# Altium PCB HGD_Sensor(v0.1)-20200807.PcbDoc (part 3 of 3)
Units mil, origin at the board's own origin, x right, y up, seen from the top; angles counter-clockwise.
Board outline 2299.21 x 2125.98 mil, 2 copper layers (TopLayer, BottomLayer); 55 components, 33 nets, 176 pads, 331 vias.
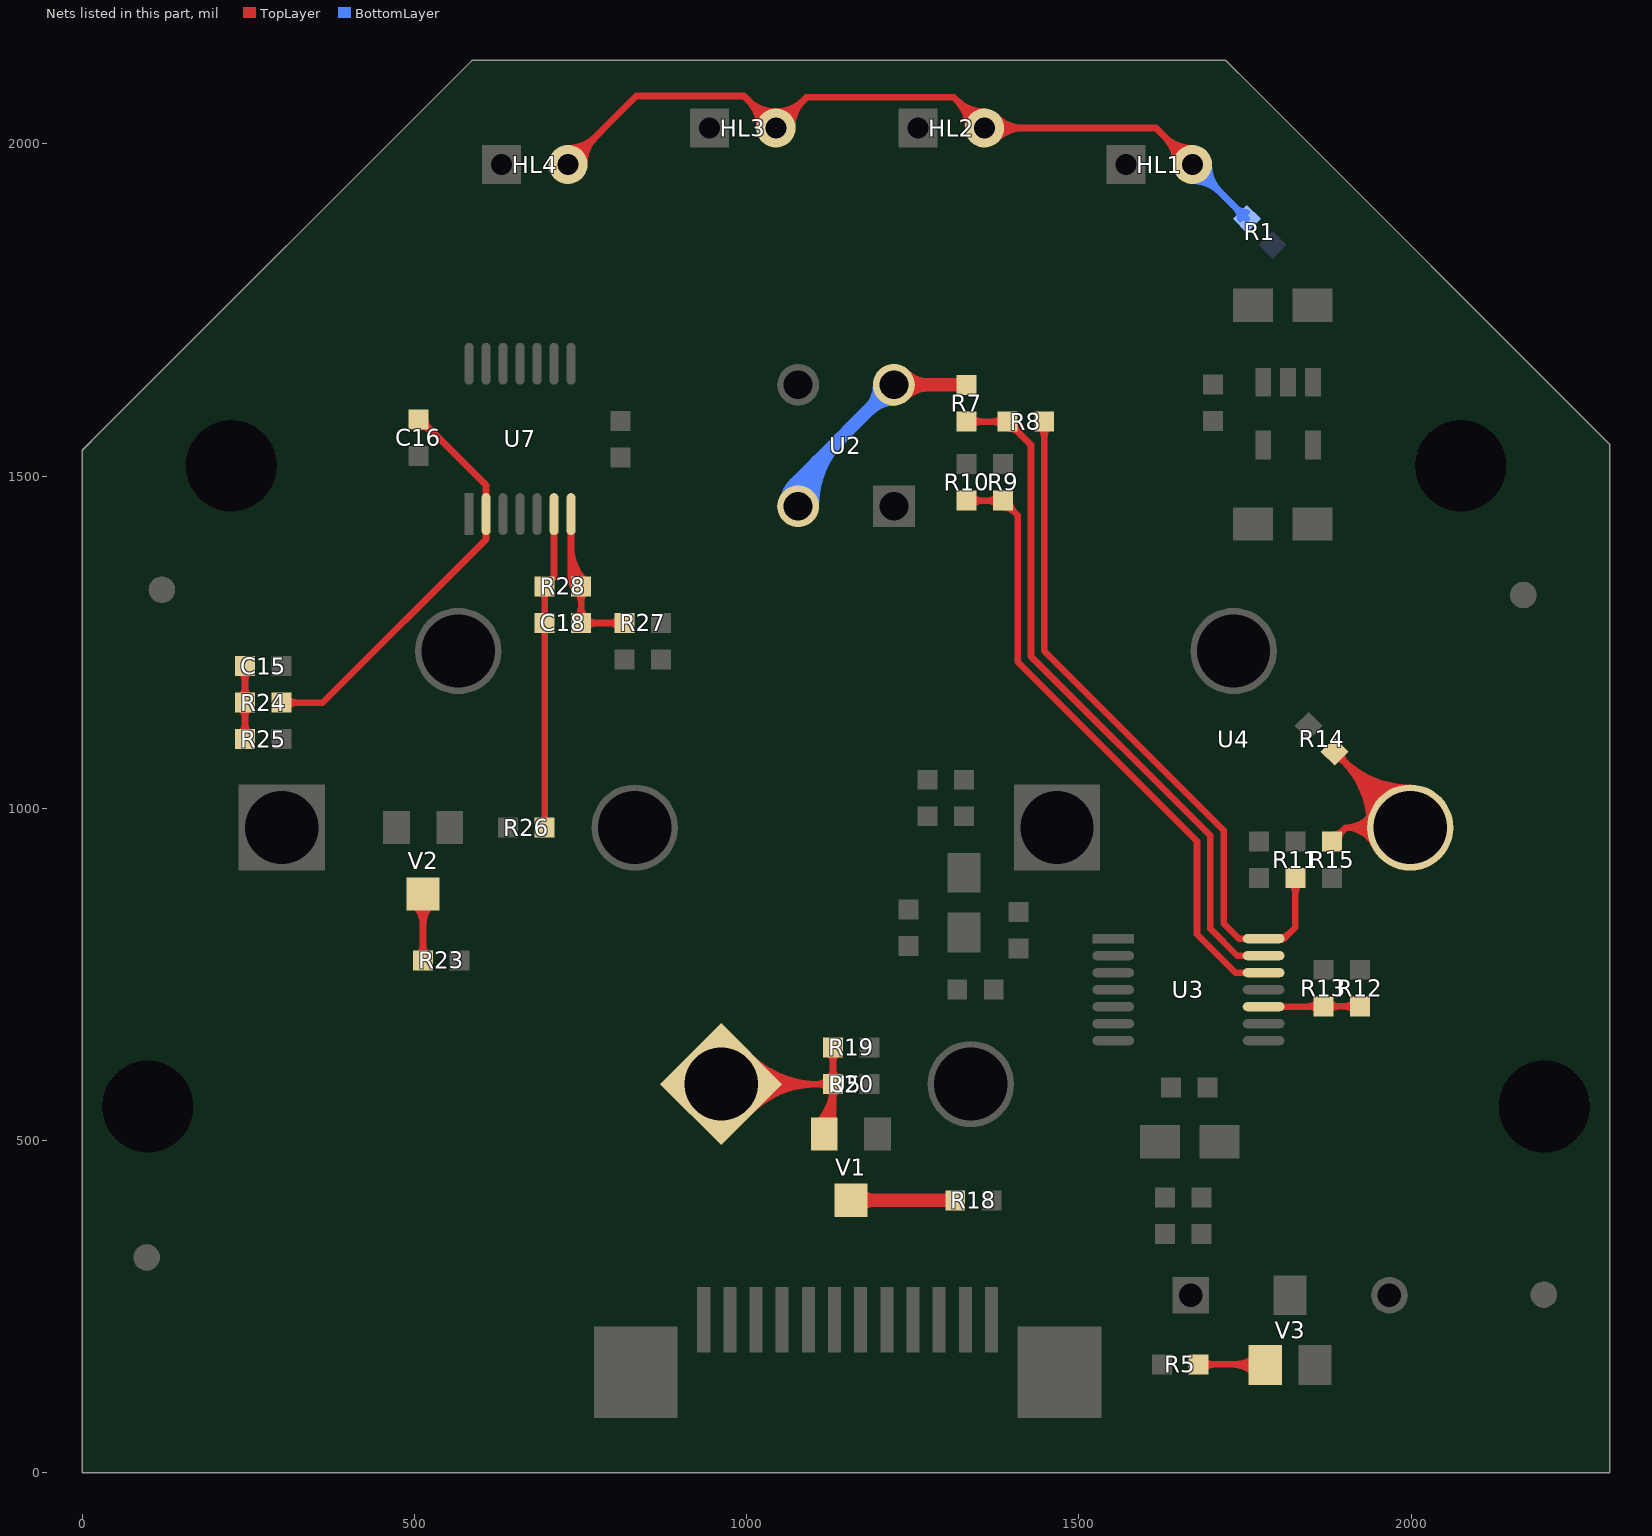
[diagram p3: the nets of this part, all layers, seen from the top]

## Via types
v1: diameter 24, hole 12, TopLayer to BottomLayer, tented both sides, 331 vias

## Nets (pads, with @x,y where several pads share a name; then routed paths per layer and width w, separated by ;. In a path a pad name is that pad's centre, name@x,y a point inside that pad or via, vN(x,y) a via of type N, cw(c..) or ccw(c..) an arc to the next point about the centre after c; other vN are vias at no path point) (continued)
NetC15_2: C15.2 R24.2 R25.1 | length 716.8
  TopLayer w10: R25.1@245,1104 R24.2@245,1159 C15.2@245,1214 ; R25.1@237.93,1111.07 ccw(c220.86,1128.14) 245,1128.14 ; R25.1@237.93,1111.07 ccw(c220.86,1128.14) 245,1128.14 ; R25.1@237.93,1111.07 ccw(c220.86,1128.14) 245,1128.14 ; R25.1@237.93,1111.07 ccw(c220.86,1128.14) 245,1128.14 ; R24.2@237.93,1151.93 cw(c220.86,1134.86) 245,1134.86 ; R24.2@237.93,1151.93 cw(c220.86,1134.86) 245,1134.86 ; R24.2@237.93,1151.93 cw(c220.86,1134.86) 245,1134.86 ; R24.2@237.93,1151.93 cw(c220.86,1134.86) 245,1134.86 ; R24.2@237.93,1166.07 ccw(c220.86,1183.14) 245,1183.14 ; R24.2@237.93,1166.07 ccw(c220.86,1183.14) 245,1183.14 ; R24.2@237.93,1166.07 ccw(c220.86,1183.14) 245,1183.14 ; R24.2@237.93,1166.07 ccw(c220.86,1183.14) 245,1183.14 ; C15.2@237.93,1206.93 cw(c220.86,1189.86) 245,1189.86 ; C15.2@237.93,1206.93 cw(c220.86,1189.86) 245,1189.86 ; C15.2@237.93,1206.93 cw(c220.86,1189.86) 245,1189.86 ; C15.2@237.93,1206.93 cw(c220.86,1189.86) 245,1189.86 ; 245,1128.14 ccw(c269.14,1128.14) R25.1@252.07,1111.07 ; 245,1128.14 ccw(c269.14,1128.14) R25.1@252.07,1111.07 ; 245,1128.14 ccw(c269.14,1128.14) R25.1@252.07,1111.07 ; 245,1128.14 ccw(c269.14,1128.14) R25.1@252.07,1111.07 ; 245,1134.86 cw(c269.14,1134.86) R24.2@252.07,1151.93 ; 245,1134.86 cw(c269.14,1134.86) R24.2@252.07,1151.93 ; 245,1134.86 cw(c269.14,1134.86) R24.2@252.07,1151.93 ; 245,1134.86 cw(c269.14,1134.86) R24.2@252.07,1151.93 ; 245,1183.14 ccw(c269.14,1183.14) R24.2@252.07,1166.07 ; 245,1183.14 ccw(c269.14,1183.14) R24.2@252.07,1166.07 ; 245,1183.14 ccw(c269.14,1183.14) R24.2@252.07,1166.07 ; 245,1183.14 ccw(c269.14,1183.14) R24.2@252.07,1166.07 ; 245,1189.86 cw(c269.14,1189.86) C15.2@252.07,1206.93 ; 245,1189.86 cw(c269.14,1189.86) C15.2@252.07,1206.93 ; 245,1189.86 cw(c269.14,1189.86) C15.2@252.07,1206.93 ; 245,1189.86 cw(c269.14,1189.86) C15.2@252.07,1206.93
NetC16_1: C16.1 R24.1 U7.2 | length 861.5
  TopLayer w10: R24.1@300,1159 362,1159 607.82,1404.82 U7.2@607.82,1442.81 607.82,1486.47 509.28,1585 C16.1@506,1585 ; R24.1@307.07,1151.93 cw(c324.14,1134.86) 324.14,1159 ; R24.1@307.07,1151.93 cw(c324.14,1134.86) 324.14,1159 ; R24.1@307.07,1151.93 cw(c324.14,1134.86) 324.14,1159 ; R24.1@307.07,1151.93 cw(c324.14,1134.86) 324.14,1159 ; R24.1@307.07,1166.07 ccw(c324.14,1183.14) 324.14,1159 ; R24.1@307.07,1166.07 ccw(c324.14,1183.14) 324.14,1159 ; R24.1@307.07,1166.07 ccw(c324.14,1183.14) 324.14,1159 ; R24.1@307.07,1166.07 ccw(c324.14,1183.14) 324.14,1159 ; C16.1@506,1575 cw(c506,1542.93) 528.68,1565.61 ccw(c506,1542.93) C16.1@506,1575 ; C16.1@516,1585 ccw(c532.21,1585) 520.75,1573.54 cw(c532.21,1585) C16.1@516,1585
NetC18_1: C18.1 R27.1 R28.2 U7.7 | length 1213.4
  TopLayer w10: U7.7@735.77,1442.81 735.77,1349.23 ; R27.1@816,1279 C18.1@751,1279 R28.2@751,1334 ; 735.77,1349.23 ccw(c748.63,1362.09) R28.2@750.16,1343.96 ; 735.77,1349.23 cw(c722.91,1336.37) R28.2@741.04,1334.84 ; 735.77,1349.23 ccw(c748.63,1362.09) R28.2@750.16,1343.96 ; 735.77,1349.23 cw(c722.91,1336.37) R28.2@741.04,1334.84 ; 735.77,1349.23 ccw(c748.63,1362.09) R28.2@750.16,1343.96 ; 735.77,1349.23 cw(c722.91,1336.37) R28.2@741.04,1334.84 ; 735.77,1349.23 ccw(c748.63,1362.09) R28.2@750.16,1343.96 ; 735.77,1349.23 cw(c722.91,1336.37) R28.2@741.04,1334.84 ; 735.77,1349.23 R28.2@751,1334 ; C18.1@743.93,1286.07 ccw(c726.86,1303.14) 751,1303.14 ; C18.1@743.93,1286.07 ccw(c726.86,1303.14) 751,1303.14 ; C18.1@743.93,1286.07 ccw(c726.86,1303.14) 751,1303.14 ; C18.1@743.93,1286.07 ccw(c726.86,1303.14) 751,1303.14 ; R28.2@743.93,1326.93 cw(c726.86,1309.86) 751,1309.86 ; R28.2@743.93,1326.93 cw(c726.86,1309.86) 751,1309.86 ; R28.2@743.93,1326.93 cw(c726.86,1309.86) 751,1309.86 ; R28.2@743.93,1326.93 cw(c763.62,1346.62) 735.77,1346.62 ccw(c763.62,1346.62) R28.2@743.93,1326.93 ; R28.2@743.93,1326.93 cw(c726.86,1309.86) 751,1309.86 ; 751,1303.14 ccw(c775.14,1303.14) C18.1@758.07,1286.07 ; 751,1303.14 ccw(c775.14,1303.14) C18.1@758.07,1286.07 ; 751,1303.14 ccw(c775.14,1303.14) C18.1@758.07,1286.07 ; 751,1303.14 ccw(c775.14,1303.14) C18.1@758.07,1286.07 ; 751,1309.86 cw(c775.14,1309.86) R28.2@758.07,1326.93 ; 751,1309.86 cw(c775.14,1309.86) R28.2@758.07,1326.93 ; 751,1309.86 cw(c775.14,1309.86) R28.2@758.07,1326.93 ; 751,1309.86 cw(c775.14,1309.86) R28.2@758.07,1326.93 ; R28.2@751,1334 cw(c787.76,1370.76) 735.77,1370.76 ccw(c787.76,1370.76) R28.2@751,1334 ; C18.1@758.07,1271.93 cw(c775.14,1254.86) 775.14,1279 ; C18.1@758.07,1271.93 cw(c775.14,1254.86) 775.14,1279 ; C18.1@758.07,1271.93 cw(c775.14,1254.86) 775.14,1279 ; C18.1@758.07,1271.93 cw(c775.14,1254.86) 775.14,1279 ; C18.1@758.07,1286.07 ccw(c775.14,1303.14) 775.14,1279 ; C18.1@758.07,1286.07 ccw(c775.14,1303.14) 775.14,1279 ; C18.1@758.07,1286.07 ccw(c775.14,1303.14) 775.14,1279 ; C18.1@758.07,1286.07 ccw(c775.14,1303.14) 775.14,1279 ; 791.86,1279 ccw(c791.86,1303.14) R27.1@808.93,1286.07 ; 791.86,1279 cw(c791.86,1254.86) R27.1@808.93,1271.93 ; 791.86,1279 ccw(c791.86,1303.14) R27.1@808.93,1286.07 ; 791.86,1279 cw(c791.86,1254.86) R27.1@808.93,1271.93 ; 791.86,1279 ccw(c791.86,1303.14) R27.1@808.93,1286.07 ; 791.86,1279 cw(c791.86,1254.86) R27.1@808.93,1271.93 ; 791.86,1279 ccw(c791.86,1303.14) R27.1@808.93,1286.07 ; 791.86,1279 cw(c791.86,1254.86) R27.1@808.93,1271.93 ; 735.77,1394.91 ccw(c811.91,1394.91) 758.07,1341.07 cw(c811.91,1394.91) 735.77,1394.91
NetC18_2: C18.2 R26.2 R28.1 U7.6 | length 477.7
  TopLayer w10: R26.2@696,971 C18.2@696,1279 R28.1@696,1334 710.18,1348.18 U7.6@710.18,1442.81
NetHL1_K: HL1.K HL2.K HL3.K HL4.K R1.1 | length 7441.5
  TopLayer w10: HL4.K@731,1969 834,2072 995.87,2072 HL3.K@1044,2023.87 1090.13,2070 1311.87,2070 HL2.K@1358,2023.87 1616.13,2023.87 HL1.K@1671,1969 ; HL4.K@731,1983.53 ccw(c731,2018.6) 755.8,1993.8 ; HL4.K@731,1983.53 ccw(c731,2018.6) 755.8,1993.8 ; HL4.K@731,1983.53 ccw(c731,2018.6) 755.8,1993.8 ; HL4.K@731,1983.53 ccw(c731,2018.6) 755.8,1993.8 ; HL4.K@731,1983.53 ccw(c731,2018.6) 755.8,1993.8 ; HL4.K@731,1983.53 ccw(c731,2018.6) 755.8,1993.8 ; HL4.K@731,1993.53 ccw(c731,2052.74) 772.87,2010.87 ; HL4.K@731,1993.53 ccw(c731,2052.74) 772.87,2010.87 ; HL4.K@731,1993.53 ccw(c731,2052.74) 772.87,2010.87 ; HL4.K@731,1993.53 ccw(c731,2052.74) 772.87,2010.87 ; HL4.K@731,1993.53 ccw(c731,2052.74) 772.87,2010.87 ; HL4.K@731,1993.53 ccw(c731,2052.74) 772.87,2010.87 ; HL4.K@745.53,1969 cw(c780.6,1969) 755.8,1993.8 ; HL4.K@745.53,1969 cw(c780.6,1969) 755.8,1993.8 ; HL4.K@745.53,1969 cw(c780.6,1969) 755.8,1993.8 ; HL4.K@745.53,1969 cw(c780.6,1969) 755.8,1993.8 ; HL4.K@745.53,1969 cw(c780.6,1969) 755.8,1993.8 ; HL4.K@745.53,1969 cw(c780.6,1969) 755.8,1993.8 ; HL4.K@755.53,1969 cw(c814.74,1969) 772.87,2010.87 ; HL4.K@755.53,1969 cw(c814.74,1969) 772.87,2010.87 ; HL4.K@755.53,1969 cw(c814.74,1969) 772.87,2010.87 ; HL4.K@755.53,1969 cw(c814.74,1969) 772.87,2010.87 ; HL4.K@755.53,1969 cw(c814.74,1969) 772.87,2010.87 ; HL4.K@755.53,1969 cw(c814.74,1969) 772.87,2010.87 ; 1002.13,2065.75 cw(c960.26,2023.87) HL3.K@1019.47,2023.87 ; 1002.13,2065.75 ccw(c1044,2107.62) HL3.K@1044,2048.4 ; 1002.13,2065.75 cw(c960.26,2023.87) HL3.K@1019.47,2023.87 ; 1002.13,2065.75 ccw(c1044,2107.62) HL3.K@1044,2048.4 ; 1002.13,2065.75 ccw(c1044,2107.62) HL3.K@1044,2048.4 ; 1002.13,2065.75 cw(c960.26,2023.87) HL3.K@1019.47,2023.87 ; 1002.13,2065.75 ccw(c1044,2107.62) HL3.K@1044,2048.4 ; 1002.13,2065.75 cw(c960.26,2023.87) HL3.K@1019.47,2023.87 ; 1002.13,2065.75 ccw(c1044,2107.62) HL3.K@1044,2048.4 ; 1002.13,2065.75 cw(c960.26,2023.87) HL3.K@1019.47,2023.87 ; 1002.13,2065.75 ccw(c1044,2107.62) HL3.K@1044,2048.4 ; 1002.13,2065.75 cw(c960.26,2023.87) HL3.K@1019.47,2023.87 ; 1019.2,2048.67 cw(c994.4,2023.87) HL3.K@1029.47,2023.87 ; 1019.2,2048.67 ccw(c1044,2073.47) HL3.K@1044,2038.4 ; 1019.2,2048.67 cw(c994.4,2023.87) HL3.K@1029.47,2023.87 ; 1019.2,2048.67 ccw(c1044,2073.47) HL3.K@1044,2038.4 ; 1019.2,2048.67 ccw(c1044,2073.47) HL3.K@1044,2038.4 ; 1019.2,2048.67 cw(c994.4,2023.87) HL3.K@1029.47,2023.87 ; 1019.2,2048.67 ccw(c1044,2073.47) HL3.K@1044,2038.4 ; 1019.2,2048.67 cw(c994.4,2023.87) HL3.K@1029.47,2023.87 ; 1019.2,2048.67 ccw(c1044,2073.47) HL3.K@1044,2038.4 ; 1019.2,2048.67 cw(c994.4,2023.87) HL3.K@1029.47,2023.87 ; 1019.2,2048.67 ccw(c1044,2073.47) HL3.K@1044,2038.4 ; 1019.2,2048.67 cw(c994.4,2023.87) HL3.K@1029.47,2023.87 ; HL3.K@1044,2038.4 ccw(c1044,2073.47) 1068.8,2048.67 ; HL3.K@1044,2038.4 ccw(c1044,2073.47) 1068.8,2048.67 ; HL3.K@1044,2038.4 ccw(c1044,2073.47) 1068.8,2048.67 ; HL3.K@1044,2038.4 ccw(c1044,2073.47) 1068.8,2048.67 ; HL3.K@1044,2038.4 ccw(c1044,2073.47) 1068.8,2048.67 ; HL3.K@1044,2038.4 ccw(c1044,2073.47) 1068.8,2048.67 ; HL3.K@1044,2048.4 ccw(c1044,2107.62) 1085.87,2065.75 ; HL3.K@1044,2048.4 ccw(c1044,2107.62) 1085.87,2065.75 ; HL3.K@1044,2048.4 ccw(c1044,2107.62) 1085.87,2065.75 ; HL3.K@1044,2048.4 ccw(c1044,2107.62) 1085.87,2065.75 ; HL3.K@1044,2048.4 ccw(c1044,2107.62) 1085.87,2065.75 ; HL3.K@1044,2048.4 ccw(c1044,2107.62) 1085.87,2065.75 ; HL3.K@1058.53,2023.87 cw(c1093.6,2023.87) 1068.8,2048.67 ; HL3.K@1058.53,2023.87 cw(c1093.6,2023.87) 1068.8,2048.67 ; HL3.K@1058.53,2023.87 cw(c1093.6,2023.87) 1068.8,2048.67 ; HL3.K@1058.53,2023.87 cw(c1093.6,2023.87) 1068.8,2048.67 ; HL3.K@1058.53,2023.87 cw(c1093.6,2023.87) 1068.8,2048.67 ; HL3.K@1058.53,2023.87 cw(c1093.6,2023.87) 1068.8,2048.67 ; HL3.K@1068.53,2023.87 cw(c1127.74,2023.87) 1085.87,2065.75 ; HL3.K@1068.53,2023.87 cw(c1127.74,2023.87) 1085.87,2065.75 ; HL3.K@1068.53,2023.87 cw(c1127.74,2023.87) 1085.87,2065.75 ; HL3.K@1068.53,2023.87 cw(c1127.74,2023.87) 1085.87,2065.75 ; HL3.K@1068.53,2023.87 cw(c1127.74,2023.87) 1085.87,2065.75 ; HL3.K@1068.53,2023.87 cw(c1127.74,2023.87) 1085.87,2065.75 ; 1316.13,2065.75 cw(c1274.26,2023.87) HL2.K@1333.47,2023.87 ; 1316.13,2065.75 ccw(c1358,2107.62) HL2.K@1358,2048.4 ; 1316.13,2065.75 cw(c1274.26,2023.87) HL2.K@1333.47,2023.87 ; 1316.13,2065.75 ccw(c1358,2107.62) HL2.K@1358,2048.4 ; 1316.13,2065.75 ccw(c1358,2107.62) HL2.K@1358,2048.4 ; 1316.13,2065.75 cw(c1274.26,2023.87) HL2.K@1333.47,2023.87 ; 1316.13,2065.75 ccw(c1358,2107.62) HL2.K@1358,2048.4 ; 1316.13,2065.75 cw(c1274.26,2023.87) HL2.K@1333.47,2023.87 ; 1316.13,2065.75 ccw(c1358,2107.62) HL2.K@1358,2048.4 ; 1316.13,2065.75 cw(c1274.26,2023.87) HL2.K@1333.47,2023.87 ; 1316.13,2065.75 ccw(c1358,2107.62) HL2.K@1358,2048.4 ; 1316.13,2065.75 cw(c1274.26,2023.87) HL2.K@1333.47,2023.87 ; 1333.2,2048.67 cw(c1308.4,2023.87) HL2.K@1343.47,2023.87 ; 1333.2,2048.67 ccw(c1358,2073.47) HL2.K@1358,2038.4 ; 1333.2,2048.67 cw(c1308.4,2023.87) HL2.K@1343.47,2023.87 ; 1333.2,2048.67 ccw(c1358,2073.47) HL2.K@1358,2038.4 ; 1333.2,2048.67 ccw(c1358,2073.47) HL2.K@1358,2038.4 ; 1333.2,2048.67 cw(c1308.4,2023.87) HL2.K@1343.47,2023.87 ; 1333.2,2048.67 ccw(c1358,2073.47) HL2.K@1358,2038.4 ; 1333.2,2048.67 cw(c1308.4,2023.87) HL2.K@1343.47,2023.87 ; 1333.2,2048.67 ccw(c1358,2073.47) HL2.K@1358,2038.4 ; 1333.2,2048.67 cw(c1308.4,2023.87) HL2.K@1343.47,2023.87 ; 1333.2,2048.67 ccw(c1358,2073.47) HL2.K@1358,2038.4 ; 1333.2,2048.67 cw(c1308.4,2023.87) HL2.K@1343.47,2023.87 ; HL2.K@1368.27,2013.6 cw(c1393.07,1988.8) 1393.07,2023.87 ; HL2.K@1368.27,2013.6 cw(c1393.07,1988.8) 1393.07,2023.87 ; HL2.K@1368.27,2013.6 cw(c1393.07,1988.8) 1393.07,2023.87 ; HL2.K@1368.27,2013.6 cw(c1393.07,1988.8) 1393.07,2023.87 ; HL2.K@1368.27,2013.6 cw(c1393.07,1988.8) 1393.07,2023.87 ; HL2.K@1368.27,2013.6 cw(c1393.07,1988.8) 1393.07,2023.87 ; HL2.K@1368.27,2034.15 ccw(c1393.07,2058.95) 1393.07,2023.87 ; HL2.K@1368.27,2034.15 ccw(c1393.07,2058.95) 1393.07,2023.87 ; HL2.K@1368.27,2034.15 ccw(c1393.07,2058.95) 1393.07,2023.87 ; HL2.K@1368.27,2034.15 ccw(c1393.07,2058.95) 1393.07,2023.87 ; HL2.K@1368.27,2034.15 ccw(c1393.07,2058.95) 1393.07,2023.87 ; HL2.K@1368.27,2034.15 ccw(c1393.07,2058.95) 1393.07,2023.87 ; HL2.K@1375.34,2006.53 cw(c1417.21,1964.66) 1417.21,2023.87 ; HL2.K@1375.34,2006.53 cw(c1417.21,1964.66) 1417.21,2023.87 ; HL2.K@1375.34,2006.53 cw(c1417.21,1964.66) 1417.21,2023.87 ; HL2.K@1375.34,2006.53 cw(c1417.21,1964.66) 1417.21,2023.87 ; HL2.K@1375.34,2006.53 cw(c1417.21,1964.66) 1417.21,2023.87 ; HL2.K@1375.34,2006.53 cw(c1417.21,1964.66) 1417.21,2023.87 ; HL2.K@1375.34,2041.22 ccw(c1417.21,2083.09) 1417.21,2023.87 ; HL2.K@1375.34,2041.22 ccw(c1417.21,2083.09) 1417.21,2023.87 ; HL2.K@1375.34,2041.22 ccw(c1417.21,2083.09) 1417.21,2023.87 ; HL2.K@1375.34,2041.22 ccw(c1417.21,2083.09) 1417.21,2023.87 ; HL2.K@1375.34,2041.22 ccw(c1417.21,2083.09) 1417.21,2023.87 ; HL2.K@1375.34,2041.22 ccw(c1417.21,2083.09) 1417.21,2023.87 ; 1629.13,2010.87 cw(c1587.26,1969) HL1.K@1646.47,1969 ; 1629.13,2010.87 ccw(c1671,2052.74) HL1.K@1671,1993.53 ; 1629.13,2010.87 cw(c1587.26,1969) HL1.K@1646.47,1969 ; 1629.13,2010.87 ccw(c1671,2052.74) HL1.K@1671,1993.53 ; 1629.13,2010.87 ccw(c1671,2052.74) HL1.K@1671,1993.53 ; 1629.13,2010.87 cw(c1587.26,1969) HL1.K@1646.47,1969 ; 1629.13,2010.87 ccw(c1671,2052.74) HL1.K@1671,1993.53 ; 1629.13,2010.87 cw(c1587.26,1969) HL1.K@1646.47,1969 ; 1629.13,2010.87 ccw(c1671,2052.74) HL1.K@1671,1993.53 ; 1629.13,2010.87 cw(c1587.26,1969) HL1.K@1646.47,1969 ; 1629.13,2010.87 ccw(c1671,2052.74) HL1.K@1671,1993.53 ; 1629.13,2010.87 cw(c1587.26,1969) HL1.K@1646.47,1969 ; 1646.2,1993.8 cw(c1621.4,1969) HL1.K@1656.47,1969 ; 1646.2,1993.8 ccw(c1671,2018.6) HL1.K@1671,1983.53 ; 1646.2,1993.8 cw(c1621.4,1969) HL1.K@1656.47,1969 ; 1646.2,1993.8 ccw(c1671,2018.6) HL1.K@1671,1983.53 ; 1646.2,1993.8 ccw(c1671,2018.6) HL1.K@1671,1983.53 ; 1646.2,1993.8 cw(c1621.4,1969) HL1.K@1656.47,1969 ; 1646.2,1993.8 ccw(c1671,2018.6) HL1.K@1671,1983.53 ; 1646.2,1993.8 cw(c1621.4,1969) HL1.K@1656.47,1969 ; 1646.2,1993.8 ccw(c1671,2018.6) HL1.K@1671,1983.53 ; 1646.2,1993.8 cw(c1621.4,1969) HL1.K@1656.47,1969 ; 1646.2,1993.8 ccw(c1671,2018.6) HL1.K@1671,1983.53 ; 1646.2,1993.8 cw(c1621.4,1969) HL1.K@1656.47,1969
  BottomLayer w10: HL1.K@1671,1969 R1.1@1753,1887 ; HL1.K@1671,1944.47 cw(c1671,1885.26) 1712.87,1927.13 ; HL1.K@1671,1944.47 cw(c1671,1885.26) 1712.87,1927.13 ; HL1.K@1671,1944.47 cw(c1671,1885.26) 1712.87,1927.13 ; HL1.K@1671,1944.47 cw(c1671,1885.26) 1712.87,1927.13 ; HL1.K@1671,1944.47 cw(c1671,1885.26) 1712.87,1927.13 ; HL1.K@1671,1954.47 cw(c1671,1919.4) 1695.8,1944.2 ; HL1.K@1671,1954.47 cw(c1671,1919.4) 1695.8,1944.2 ; HL1.K@1671,1954.47 cw(c1671,1919.4) 1695.8,1944.2 ; HL1.K@1671,1954.47 cw(c1671,1919.4) 1695.8,1944.2 ; HL1.K@1671,1954.47 cw(c1671,1919.4) 1695.8,1944.2 ; HL1.K@1685.53,1969 ccw(c1720.6,1969) 1695.8,1944.2 ; HL1.K@1685.53,1969 ccw(c1720.6,1969) 1695.8,1944.2 ; HL1.K@1685.53,1969 ccw(c1720.6,1969) 1695.8,1944.2 ; HL1.K@1685.53,1969 ccw(c1720.6,1969) 1695.8,1944.2 ; HL1.K@1685.53,1969 ccw(c1720.6,1969) 1695.8,1944.2 ; HL1.K@1695.53,1969 ccw(c1754.74,1969) 1712.87,1927.13 ; HL1.K@1695.53,1969 ccw(c1754.74,1969) 1712.87,1927.13 ; HL1.K@1695.53,1969 ccw(c1754.74,1969) 1712.87,1927.13 ; HL1.K@1695.53,1969 ccw(c1754.74,1969) 1712.87,1927.13 ; HL1.K@1695.53,1969 ccw(c1754.74,1969) 1712.87,1927.13 ; 1735.93,1904.07 cw(c1718.86,1887) R1.1@1743,1887 ; 1735.93,1904.07 ccw(c1753,1921.14) R1.1@1753,1897 ; 1735.93,1904.07 ccw(c1753,1921.14) R1.1@1753,1897 ; 1735.93,1904.07 cw(c1718.86,1887) R1.1@1743,1887 ; 1735.93,1904.07 ccw(c1753,1921.14) R1.1@1753,1897 ; 1735.93,1904.07 cw(c1718.86,1887) R1.1@1743,1887 ; 1735.93,1904.07 ccw(c1753,1921.14) R1.1@1753,1897 ; 1735.93,1904.07 cw(c1718.86,1887) R1.1@1743,1887 ; 1735.93,1904.07 ccw(c1753,1921.14) R1.1@1753,1897 ; 1735.93,1904.07 cw(c1718.86,1887) R1.1@1743,1887
NetR5_2: R5.2 V3.B | length 778
  TopLayer w10: R5.2@1680,163 1779.5,163 V3.B@1780.5,162 ; R5.2@1687.07,155.93 cw(c1704.14,138.86) 1704.14,163 ; R5.2@1687.07,155.93 cw(c1704.14,138.86) 1704.14,163 ; R5.2@1687.07,155.93 cw(c1704.14,138.86) 1704.14,163 ; R5.2@1687.07,155.93 cw(c1704.14,138.86) 1704.14,163 ; R5.2@1687.07,155.93 cw(c1704.14,138.86) 1704.14,163 ; R5.2@1687.07,170.07 ccw(c1704.14,187.14) 1704.14,163 ; R5.2@1687.07,170.07 ccw(c1704.14,187.14) 1704.14,163 ; R5.2@1687.07,170.07 ccw(c1704.14,187.14) 1704.14,163 ; R5.2@1687.07,170.07 ccw(c1704.14,187.14) 1704.14,163 ; R5.2@1687.07,170.07 ccw(c1704.14,187.14) 1704.14,163 ; 1729.8,163 cw(c1729.8,111.3) V3.B@1766.36,147.86 ; 1729.8,163 cw(c1729.8,111.3) V3.B@1766.36,147.86 ; 1729.8,163 cw(c1729.8,111.3) V3.B@1766.36,147.86 ; 1729.8,163 cw(c1729.8,111.3) V3.B@1766.36,147.86 ; 1729.8,163 cw(c1729.8,111.3) V3.B@1766.36,147.86 ; 1734.63,163 ccw(c1734.63,207.87) V3.B@1766.36,176.14 ; 1734.63,163 ccw(c1734.63,207.87) V3.B@1766.36,176.14 ; 1734.63,163 ccw(c1734.63,207.87) V3.B@1766.36,176.14 ; 1734.63,163 ccw(c1734.63,207.87) V3.B@1766.36,176.14 ; 1734.63,163 ccw(c1734.63,207.87) V3.B@1766.36,176.14 ; 1753.94,163 cw(c1753.94,135.44) V3.B@1773.43,154.93 ; 1753.94,163 cw(c1753.94,135.44) V3.B@1773.43,154.93 ; 1753.94,163 cw(c1753.94,135.44) V3.B@1773.43,154.93 ; 1753.94,163 cw(c1753.94,135.44) V3.B@1773.43,154.93 ; 1753.94,163 cw(c1753.94,135.44) V3.B@1773.43,154.93
NetR7_1: R7.1 R8.2 U3.13 | length 1617.4
  TopLayer w10: R7.1@1331,1582 R8.2@1393,1582 1428,1547 1428,1228.72 1698,958.72 1698,818.72 1738.53,778.18 U3.13@1778.19,778.18 ; R7.1@1338.07,1574.93 cw(c1355.14,1557.86) 1355.14,1582 ; R7.1@1338.07,1574.93 cw(c1355.14,1557.86) 1355.14,1582 ; R7.1@1338.07,1574.93 cw(c1355.14,1557.86) 1355.14,1582 ; R7.1@1338.07,1574.93 cw(c1355.14,1557.86) 1355.14,1582 ; R7.1@1338.07,1574.93 cw(c1355.14,1557.86) 1355.14,1582 ; R7.1@1338.07,1589.07 ccw(c1355.14,1606.14) 1355.14,1582 ; R7.1@1338.07,1589.07 ccw(c1355.14,1606.14) 1355.14,1582 ; R7.1@1338.07,1589.07 ccw(c1355.14,1606.14) 1355.14,1582 ; R7.1@1338.07,1589.07 ccw(c1355.14,1606.14) 1355.14,1582 ; R7.1@1338.07,1589.07 ccw(c1355.14,1606.14) 1355.14,1582 ; 1368.86,1582 cw(c1368.86,1557.86) R8.2@1385.93,1574.93 ; 1368.86,1582 ccw(c1368.86,1606.14) R8.2@1385.93,1589.07 ; 1368.86,1582 ccw(c1368.86,1606.14) R8.2@1385.93,1589.07 ; 1368.86,1582 cw(c1368.86,1557.86) R8.2@1385.93,1574.93 ; 1368.86,1582 ccw(c1368.86,1606.14) R8.2@1385.93,1589.07 ; 1368.86,1582 cw(c1368.86,1557.86) R8.2@1385.93,1574.93 ; 1368.86,1582 ccw(c1368.86,1606.14) R8.2@1385.93,1589.07 ; 1368.86,1582 cw(c1368.86,1557.86) R8.2@1385.93,1574.93 ; 1368.86,1582 ccw(c1368.86,1606.14) R8.2@1385.93,1589.07 ; 1368.86,1582 cw(c1368.86,1557.86) R8.2@1385.93,1574.93 ; R8.2@1393,1572 cw(c1393,1547.86) 1410.07,1564.93 ; R8.2@1393,1572 cw(c1393,1547.86) 1410.07,1564.93 ; R8.2@1393,1572 cw(c1393,1547.86) 1410.07,1564.93 ; R8.2@1393,1572 cw(c1393,1547.86) 1410.07,1564.93 ; R8.2@1393,1572 cw(c1393,1547.86) 1410.07,1564.93 ; R8.2@1403,1582 ccw(c1427.14,1582) 1410.07,1564.93 ; R8.2@1403,1582 ccw(c1427.14,1582) 1410.07,1564.93 ; R8.2@1403,1582 ccw(c1427.14,1582) 1410.07,1564.93 ; R8.2@1403,1582 ccw(c1427.14,1582) 1410.07,1564.93 ; R8.2@1403,1582 ccw(c1427.14,1582) 1410.07,1564.93
NetR7_2: R7.2 U2.2 U2.4 | length 2549.7
  TopLayer w10: R7.2@1330.66,1637.34 R7.2@1331,1637
  TopLayer w20: U2.4@1221.65,1637.34 R7.2@1330.66,1637.34 ; U2.4@1236.85,1622.14 cw(c1273.55,1585.44) 1273.55,1637.34 ; U2.4@1236.85,1622.14 cw(c1273.55,1585.44) 1273.55,1637.34 ; U2.4@1236.85,1622.14 cw(c1273.55,1585.44) 1273.55,1637.34 ; U2.4@1236.85,1622.14 cw(c1273.55,1585.44) 1273.55,1637.34 ; U2.4@1236.85,1622.14 cw(c1273.55,1585.44) 1273.55,1637.34 ; U2.4@1236.85,1652.54 ccw(c1273.55,1689.23) 1273.55,1637.34 ; U2.4@1236.85,1652.54 ccw(c1273.55,1689.23) 1273.55,1637.34 ; U2.4@1236.85,1652.54 ccw(c1273.55,1689.23) 1273.55,1637.34 ; U2.4@1236.85,1652.54 ccw(c1273.55,1689.23) 1273.55,1637.34 ; U2.4@1236.85,1652.54 ccw(c1273.55,1689.23) 1273.55,1637.34
  BottomLayer w20: U2.2@1077.56,1454.66 1077.56,1493.24 ; U2.4@1221.65,1637.34 1077.56,1493.24 ; U2.2@1059.06,1454.66 cw(c1107.53,1454.66) 1073.25,1488.94 ; U2.2@1059.06,1454.66 cw(c1107.53,1454.66) 1073.25,1488.94 ; U2.2@1059.06,1454.66 cw(c1107.53,1454.66) 1073.25,1488.94 ; U2.2@1059.06,1454.66 cw(c1107.53,1454.66) 1073.25,1488.94 ; U2.2@1059.06,1454.66 cw(c1107.53,1454.66) 1073.25,1488.94 ; U2.2@1066.25,1472.94 ccw(c1053.68,1493.24) 1077.56,1493.24 ; U2.2@1066.25,1472.94 ccw(c1053.68,1493.24) 1077.56,1493.24 ; U2.2@1066.25,1472.94 ccw(c1053.68,1493.24) 1077.56,1493.24 ; U2.2@1066.25,1472.94 ccw(c1053.68,1493.24) 1077.56,1493.24 ; U2.2@1066.25,1472.94 ccw(c1053.68,1493.24) 1077.56,1493.24 ; 1077.56,1493.24 ccw(c1101.43,1493.24) U2.2@1088.87,1472.94 ; 1077.56,1493.24 ccw(c1101.43,1493.24) U2.2@1088.87,1472.94 ; 1077.56,1493.24 ccw(c1101.43,1493.24) U2.2@1088.87,1472.94 ; 1077.56,1493.24 ccw(c1101.43,1493.24) U2.2@1088.87,1472.94 ; 1077.56,1493.24 ccw(c1101.43,1493.24) U2.2@1088.87,1472.94 ; U2.2@1079.06,1454.66 cw(c1175.81,1454.66) 1107.4,1523.08 ; U2.2@1079.06,1454.66 cw(c1175.81,1454.66) 1107.4,1523.08 ; U2.2@1079.06,1454.66 cw(c1175.81,1454.66) 1107.4,1523.08 ; U2.2@1079.06,1454.66 cw(c1175.81,1454.66) 1107.4,1523.08 ; U2.2@1079.06,1454.66 cw(c1175.81,1454.66) 1107.4,1523.08 ; U2.2@1099.06,1454.66 cw(c1244.1,1454.66) 1141.54,1557.22 ; U2.2@1099.06,1454.66 cw(c1244.1,1454.66) 1141.54,1557.22 ; U2.2@1099.06,1454.66 cw(c1244.1,1454.66) 1141.54,1557.22 ; U2.2@1099.06,1454.66 cw(c1244.1,1454.66) 1141.54,1557.22 ; U2.2@1099.06,1454.66 cw(c1244.1,1454.66) 1141.54,1557.22 ; 1184.96,1600.64 cw(c1221.65,1563.95) U2.4@1221.65,1615.84 ; 1184.96,1600.64 ccw(c1148.26,1637.34) U2.4@1200.16,1637.34 ; 1184.96,1600.64 ccw(c1148.26,1637.34) U2.4@1200.16,1637.34 ; 1184.96,1600.64 cw(c1221.65,1563.95) U2.4@1221.65,1615.84 ; 1184.96,1600.64 ccw(c1148.26,1637.34) U2.4@1200.16,1637.34 ; 1184.96,1600.64 cw(c1221.65,1563.95) U2.4@1221.65,1615.84 ; 1184.96,1600.64 ccw(c1148.26,1637.34) U2.4@1200.16,1637.34 ; 1184.96,1600.64 cw(c1221.65,1563.95) U2.4@1221.65,1615.84 ; 1184.96,1600.64 ccw(c1148.26,1637.34) U2.4@1200.16,1637.34 ; 1184.96,1600.64 cw(c1221.65,1563.95) U2.4@1221.65,1615.84
NetR8_1: R8.1 R11.2 U3.14 | length 1519.4
  TopLayer w10: R8.1@1448,1582 1448,1237 1718,967 1718,827 1741.23,803.77 U3.14@1778.19,803.77 1808.77,803.77 1826,821 R11.2@1826,895 ; R8.1@1440.93,1574.93 cw(c1423.86,1557.86) 1448,1557.86 ; R8.1@1440.93,1574.93 cw(c1423.86,1557.86) 1448,1557.86 ; R8.1@1440.93,1574.93 cw(c1423.86,1557.86) 1448,1557.86 ; R8.1@1440.93,1574.93 cw(c1423.86,1557.86) 1448,1557.86 ; R8.1@1440.93,1574.93 cw(c1423.86,1557.86) 1448,1557.86 ; 1448,1557.86 cw(c1472.14,1557.86) R8.1@1455.07,1574.93 ; 1448,1557.86 cw(c1472.14,1557.86) R8.1@1455.07,1574.93 ; 1448,1557.86 cw(c1472.14,1557.86) R8.1@1455.07,1574.93 ; 1448,1557.86 cw(c1472.14,1557.86) R8.1@1455.07,1574.93 ; 1448,1557.86 cw(c1472.14,1557.86) R8.1@1455.07,1574.93 ; U3.14@1802.8,805.66 ccw(c1802.8,824.65) 1816.22,811.22 ; U3.14@1802.8,805.66 ccw(c1802.8,824.65) 1816.22,811.22 ; U3.14@1802.8,805.66 ccw(c1802.8,824.65) 1816.22,811.22 ; U3.14@1802.8,805.66 ccw(c1802.8,824.65) 1816.22,811.22 ; U3.14@1802.8,805.66 ccw(c1802.8,824.65) 1816.22,811.22 ; R11.2@1818.93,887.93 cw(c1801.86,870.86) 1826,870.86 ; R11.2@1818.93,887.93 cw(c1801.86,870.86) 1826,870.86 ; R11.2@1818.93,887.93 cw(c1801.86,870.86) 1826,870.86 ; R11.2@1818.93,887.93 cw(c1801.86,870.86) 1826,870.86 ; R11.2@1818.93,887.93 cw(c1801.86,870.86) 1826,870.86 ; 1826,870.86 cw(c1850.14,870.86) R11.2@1833.07,887.93 ; 1826,870.86 cw(c1850.14,870.86) R11.2@1833.07,887.93 ; 1826,870.86 cw(c1850.14,870.86) R11.2@1833.07,887.93 ; 1826,870.86 cw(c1850.14,870.86) R11.2@1833.07,887.93 ; 1826,870.86 cw(c1850.14,870.86) R11.2@1833.07,887.93
NetR9_1: R9.1 R10.1 U3.12 | length 1521.5
  TopLayer w10: R10.1@1331,1463 R9.1@1386,1463 1408,1441 1408,1220.43 1678,950.43 1678,810.43 1735.84,752.59 U3.12@1778.19,752.59 ; R10.1@1338.07,1455.93 cw(c1355.14,1438.86) 1355.14,1463 ; R10.1@1338.07,1455.93 cw(c1355.14,1438.86) 1355.14,1463 ; R10.1@1338.07,1455.93 cw(c1355.14,1438.86) 1355.14,1463 ; R10.1@1338.07,1455.93 cw(c1355.14,1438.86) 1355.14,1463 ; R10.1@1338.07,1455.93 cw(c1355.14,1438.86) 1355.14,1463 ; R10.1@1338.07,1470.07 ccw(c1355.14,1487.14) 1355.14,1463 ; R10.1@1338.07,1470.07 ccw(c1355.14,1487.14) 1355.14,1463 ; R10.1@1338.07,1470.07 ccw(c1355.14,1487.14) 1355.14,1463 ; R10.1@1338.07,1470.07 ccw(c1355.14,1487.14) 1355.14,1463 ; R10.1@1338.07,1470.07 ccw(c1355.14,1487.14) 1355.14,1463 ; 1361.86,1463 cw(c1361.86,1438.86) R9.1@1378.93,1455.93 ; 1361.86,1463 ccw(c1361.86,1487.14) R9.1@1378.93,1470.07 ; 1361.86,1463 ccw(c1361.86,1487.14) R9.1@1378.93,1470.07 ; 1361.86,1463 cw(c1361.86,1438.86) R9.1@1378.93,1455.93 ; 1361.86,1463 ccw(c1361.86,1487.14) R9.1@1378.93,1470.07 ; 1361.86,1463 cw(c1361.86,1438.86) R9.1@1378.93,1455.93 ; 1361.86,1463 ccw(c1361.86,1487.14) R9.1@1378.93,1470.07 ; 1361.86,1463 cw(c1361.86,1438.86) R9.1@1378.93,1455.93 ; 1361.86,1463 ccw(c1361.86,1487.14) R9.1@1378.93,1470.07 ; 1361.86,1463 cw(c1361.86,1438.86) R9.1@1378.93,1455.93 ; R9.1@1386,1453 cw(c1386,1428.86) 1403.07,1445.93 ; R9.1@1386,1453 cw(c1386,1428.86) 1403.07,1445.93 ; R9.1@1386,1453 cw(c1386,1428.86) 1403.07,1445.93 ; R9.1@1386,1453 cw(c1386,1428.86) 1403.07,1445.93 ; R9.1@1386,1453 cw(c1386,1428.86) 1403.07,1445.93 ; R9.1@1396,1463 ccw(c1420.14,1463) 1403.07,1445.93 ; R9.1@1396,1463 ccw(c1420.14,1463) 1403.07,1445.93 ; R9.1@1396,1463 ccw(c1420.14,1463) 1403.07,1445.93 ; R9.1@1396,1463 ccw(c1420.14,1463) 1403.07,1445.93 ; R9.1@1396,1463 ccw(c1420.14,1463) 1403.07,1445.93
NetR12_1: R12.1 R13.1 U3.10 | length 713.9
  TopLayer w10: U3.10@1778.19,701.41 1867.41,701.41 R13.1@1868,702 R12.1@1923,702 ; 1842.43,701.41 ccw(c1842.43,727.57) R13.1@1860.93,709.07 ; 1842.43,701.41 ccw(c1842.43,727.57) R13.1@1860.93,709.07 ; 1842.43,701.41 ccw(c1842.43,727.57) R13.1@1860.93,709.07 ; 1842.43,701.41 ccw(c1842.43,727.57) R13.1@1860.93,709.07 ; 1842.43,701.41 ccw(c1842.43,727.57) R13.1@1860.93,709.07 ; 1845.28,701.41 cw(c1845.28,679.28) R13.1@1860.93,694.93 ; 1845.28,701.41 cw(c1845.28,679.28) R13.1@1860.93,694.93 ; 1845.28,701.41 cw(c1845.28,679.28) R13.1@1860.93,694.93 ; 1845.28,701.41 cw(c1845.28,679.28) R13.1@1860.93,694.93 ; 1845.28,701.41 cw(c1845.28,679.28) R13.1@1860.93,694.93 ; R13.1@1875.07,694.93 cw(c1892.14,677.86) 1892.14,702 ; R13.1@1875.07,694.93 cw(c1892.14,677.86) 1892.14,702 ; R13.1@1875.07,694.93 cw(c1892.14,677.86) 1892.14,702 ; R13.1@1875.07,694.93 cw(c1892.14,677.86) 1892.14,702 ; R13.1@1875.07,694.93 cw(c1892.14,677.86) 1892.14,702 ; R13.1@1875.07,709.07 ccw(c1892.14,726.14) 1892.14,702 ; R13.1@1875.07,709.07 ccw(c1892.14,726.14) 1892.14,702 ; R13.1@1875.07,709.07 ccw(c1892.14,726.14) 1892.14,702 ; R13.1@1875.07,709.07 ccw(c1892.14,726.14) 1892.14,702 ; R13.1@1875.07,709.07 ccw(c1892.14,726.14) 1892.14,702 ; 1898.86,702 cw(c1898.86,677.86) R12.1@1915.93,694.93 ; 1898.86,702 ccw(c1898.86,726.14) R12.1@1915.93,709.07 ; 1898.86,702 ccw(c1898.86,726.14) R12.1@1915.93,709.07 ; 1898.86,702 cw(c1898.86,677.86) R12.1@1915.93,694.93 ; 1898.86,702 ccw(c1898.86,726.14) R12.1@1915.93,709.07 ; 1898.86,702 cw(c1898.86,677.86) R12.1@1915.93,694.93 ; 1898.86,702 ccw(c1898.86,726.14) R12.1@1915.93,709.07 ; 1898.86,702 cw(c1898.86,677.86) R12.1@1915.93,694.93 ; 1898.86,702 ccw(c1898.86,726.14) R12.1@1915.93,709.07 ; 1898.86,702 cw(c1898.86,677.86) R12.1@1915.93,694.93
NetR14_2: R14.2 R15.1 U4.3 | length 4354.3
  TopLayer w10: R15.1@1881,950 1902,971 ; R14.2@1884.89,1085.11 1998.75,971.25 U4.3@1998.75,971 1902,971 ; R14.2@1884.89,1075.11 cw(c1884.89,1050.97) 1901.96,1068.04 ; R14.2@1884.89,1075.11 cw(c1884.89,1050.97) 1901.96,1068.04 ; R14.2@1884.89,1075.11 cw(c1884.89,1050.97) 1901.96,1068.04 ; R14.2@1884.89,1075.11 cw(c1884.89,1050.97) 1901.96,1068.04 ; R14.2@1884.89,1075.11 cw(c1884.89,1050.97) 1901.96,1068.04 ; R14.2@1894.89,1085.11 ccw(c1919.03,1085.11) 1901.96,1068.04 ; R14.2@1894.89,1085.11 ccw(c1919.03,1085.11) 1901.96,1068.04 ; R14.2@1894.89,1085.11 ccw(c1919.03,1085.11) 1901.96,1068.04 ; R14.2@1894.89,1085.11 ccw(c1919.03,1085.11) 1901.96,1068.04 ; R14.2@1894.89,1085.11 ccw(c1919.03,1085.11) 1901.96,1068.04 ; 1896.21,1073.79 cw(c1793.42,971) U4.3@1938.79,971 ; 1896.21,1073.79 cw(c1793.42,971) U4.3@1938.79,971 ; 1896.21,1073.79 cw(c1793.42,971) U4.3@1938.79,971 ; 1896.21,1073.79 cw(c1793.42,971) U4.3@1938.79,971 ; 1896.21,1073.79 cw(c1793.42,971) U4.3@1938.79,971 ; 1896.82,1073.18 ccw(c1998.75,1175.11) U4.3@1998.75,1030.96 ; 1896.82,1073.18 ccw(c1998.75,1175.11) U4.3@1998.75,1030.96 ; 1896.82,1073.18 ccw(c1998.75,1175.11) U4.3@1998.75,1030.96 ; 1896.82,1073.18 ccw(c1998.75,1175.11) U4.3@1998.75,1030.96 ; 1896.82,1073.18 ccw(c1998.75,1175.11) U4.3@1998.75,1030.96 ; 1898.07,967.07 ccw(c1915.14,950) 1891,950 cw(c1915.14,950) 1898.07,967.07 ; 1898.07,967.07 cw(c1881,984.14) 1881,960 ccw(c1881,984.14) 1898.07,967.07 ; 1902,971 ccw(c1902,1019.07) 1945.05,997.68 cw(c1902,1019.07) 1902,971 ; 1902,971 cw(c1902,922.93) 1945.05,944.32 ccw(c1902,922.93) 1902,971 ; 1913.28,1056.72 cw(c1827.56,971) U4.3@1948.79,971 ; 1913.28,1056.72 cw(c1827.56,971) U4.3@1948.79,971 ; 1913.28,1056.72 cw(c1827.56,971) U4.3@1948.79,971 ; 1913.28,1056.72 cw(c1827.56,971) U4.3@1948.79,971 ; 1913.28,1056.72 cw(c1827.56,971) U4.3@1948.79,971 ; 1913.89,1056.11 ccw(c1998.75,1140.97) U4.3@1998.75,1020.96 ; 1913.89,1056.11 ccw(c1998.75,1140.97) U4.3@1998.75,1020.96 ; 1913.89,1056.11 ccw(c1998.75,1140.97) U4.3@1998.75,1020.96 ; 1913.89,1056.11 ccw(c1998.75,1140.97) U4.3@1998.75,1020.96 ; 1913.89,1056.11 ccw(c1998.75,1140.97) U4.3@1998.75,1020.96 ; 1918.14,971 ccw(c1918.14,1011.05) 1954.01,993.23 cw(c1918.14,1011.05) 1918.14,971 ; 1918.14,971 cw(c1918.14,930.95) 1954.01,948.77 ccw(c1918.14,930.95) 1918.14,971 ; 1930.35,1039.65 cw(c1861.71,971) U4.3@1958.79,971 ; 1930.35,1039.65 cw(c1861.71,971) U4.3@1958.79,971 ; 1930.35,1039.65 cw(c1861.71,971) U4.3@1958.79,971 ; 1930.35,1039.65 cw(c1861.71,971) U4.3@1958.79,971 ; 1930.35,1039.65 cw(c1861.71,971) U4.3@1958.79,971 ; 1930.96,1039.04 ccw(c1998.75,1106.83) U4.3@1998.75,1010.96 ; 1930.96,1039.04 ccw(c1998.75,1106.83) U4.3@1998.75,1010.96 ; 1930.96,1039.04 ccw(c1998.75,1106.83) U4.3@1998.75,1010.96 ; 1930.96,1039.04 ccw(c1998.75,1106.83) U4.3@1998.75,1010.96 ; 1930.96,1039.04 ccw(c1998.75,1106.83) U4.3@1998.75,1010.96 ; 1947.42,1022.58 cw(c1895.85,971) U4.3@1968.79,971 ; 1947.42,1022.58 cw(c1895.85,971) U4.3@1968.79,971 ; 1947.42,1022.58 cw(c1895.85,971) U4.3@1968.79,971 ; 1947.42,1022.58 cw(c1895.85,971) U4.3@1968.79,971 ; 1947.42,1022.58 cw(c1895.85,971) U4.3@1968.79,971 ; 1948.03,1021.97 ccw(c1998.75,1072.68) U4.3@1998.75,1000.96 ; 1948.03,1021.97 ccw(c1998.75,1072.68) U4.3@1998.75,1000.96 ; 1948.03,1021.97 ccw(c1998.75,1072.68) U4.3@1998.75,1000.96 ; 1948.03,1021.97 ccw(c1998.75,1072.68) U4.3@1998.75,1000.96 ; 1948.03,1021.97 ccw(c1998.75,1072.68) U4.3@1998.75,1000.96
NetR18_1: R18.1 V1.3 | length 384.5
  TopLayer w20: V1.3@1157,410 R18.1@1314,410 ; V1.3@1167.61,399.39 cw(c1193.21,373.79) 1193.21,410 ; V1.3@1167.61,399.39 cw(c1193.21,373.79) 1193.21,410 ; V1.3@1167.61,399.39 cw(c1193.21,373.79) 1193.21,410 ; V1.3@1167.61,399.39 cw(c1193.21,373.79) 1193.21,410 ; V1.3@1167.61,420.61 ccw(c1193.21,446.21) 1193.21,410 ; V1.3@1167.61,420.61 ccw(c1193.21,446.21) 1193.21,410 ; V1.3@1167.61,420.61 ccw(c1193.21,446.21) 1193.21,410 ; V1.3@1167.61,420.61 ccw(c1193.21,446.21) 1193.21,410
NetR19_2: R19.2 R20.1 U5.1 V1.2 | length 2540.5
  TopLayer w10: U5.1@961.69,584.91 1129.91,584.91 R20.1@1130,585 ; V1.2@1117,510 1130,523 R20.1@1130,585 ; R19.2@1130,640 R20.1@1130,585 ; U5.1@1034.03,584.91 ccw(c1034.03,512.58) 982.88,563.73 cw(c1034.03,512.58) U5.1@1034.03,584.91 ; U5.1@1034.03,584.91 cw(c1034.03,657.24) 982.88,606.1 ccw(c1034.03,657.24) U5.1@1034.03,584.91 ; 1058.17,584.91 ccw(c1058.17,488.44) 989.95,556.66 cw(c1058.17,488.44) 1058.17,584.91 ; 1058.17,584.91 cw(c1058.17,681.39) 989.95,613.17 ccw(c1058.17,681.39) 1058.17,584.91 ; 1082.31,584.91 ccw(c1082.31,464.3) 997.02,549.58 cw(c1082.31,464.3) 1082.31,584.91 ; 1082.31,584.91 cw(c1082.31,705.53) 997.02,620.24 ccw(c1082.31,705.53) 1082.31,584.91 ; 1105.65,584.91 ccw(c1105.65,609.35) R20.1@1122.93,592.07 ; 1105.65,584.91 ccw(c1105.65,609.35) R20.1@1122.93,592.07 ; 1105.65,584.91 ccw(c1105.65,609.35) R20.1@1122.93,592.07 ; 1105.65,584.91 ccw(c1105.65,609.35) R20.1@1122.93,592.07 ; 1106.07,584.91 cw(c1106.07,561.07) R20.1@1122.93,577.93 ; 1106.07,584.91 cw(c1106.07,561.07) R20.1@1122.93,577.93 ; 1106.07,584.91 cw(c1106.07,561.07) R20.1@1122.93,577.93 ; 1106.07,584.91 cw(c1106.07,561.07) R20.1@1122.93,577.93 ; 1106.45,584.91 ccw(c1106.45,440.15) 1004.09,542.51 cw(c1106.45,440.15) 1106.45,584.91 ; 1106.45,584.91 cw(c1106.45,729.67) 1004.09,627.31 ccw(c1106.45,729.67) 1106.45,584.91 ; R20.1@1122.93,577.93 cw(c1105.86,560.86) 1130,560.86 ; R20.1@1122.93,577.93 cw(c1105.86,560.86) 1130,560.86 ; R20.1@1122.93,577.93 cw(c1105.86,560.86) 1130,560.86 ; R20.1@1122.93,577.93 cw(c1105.86,560.86) 1130,560.86 ; R20.1@1122.93,592.07 ccw(c1105.86,609.14) 1130,609.14 ; R20.1@1122.93,592.07 ccw(c1105.86,609.14) 1130,609.14 ; R20.1@1122.93,592.07 ccw(c1105.86,609.14) 1130,609.14 ; R20.1@1122.93,592.07 ccw(c1105.86,609.14) 1130,609.14 ; R19.2@1122.93,632.93 cw(c1105.86,615.86) 1130,615.86 ; R19.2@1122.93,632.93 cw(c1105.86,615.86) 1130,615.86 ; R19.2@1122.93,632.93 cw(c1105.86,615.86) 1130,615.86 ; R19.2@1122.93,632.93 cw(c1105.86,615.86) 1130,615.86 ; 1130,560.86 cw(c1154.14,560.86) R20.1@1137.07,577.93 ; 1130,560.86 cw(c1154.14,560.86) R20.1@1137.07,577.93 ; 1130,560.86 cw(c1154.14,560.86) R20.1@1137.07,577.93 ; 1130,560.86 cw(c1154.14,560.86) R20.1@1137.07,577.93 ; 1130,609.14 ccw(c1154.14,609.14) R20.1@1137.07,592.07 ; 1130,609.14 ccw(c1154.14,609.14) R20.1@1137.07,592.07 ; 1130,609.14 ccw(c1154.14,609.14) R20.1@1137.07,592.07 ; 1130,609.14 ccw(c1154.14,609.14) R20.1@1137.07,592.07 ; 1130,615.86 cw(c1154.14,615.86) R19.2@1137.07,632.93 ; 1130,615.86 cw(c1154.14,615.86) R19.2@1137.07,632.93 ; 1130,615.86 cw(c1154.14,615.86) R19.2@1137.07,632.93 ; 1130,615.86 cw(c1154.14,615.86) R19.2@1137.07,632.93 ; V1.2@1106.39,525.61 ccw(c1049.4,582.6) 1130,582.6 cw(c1049.4,582.6) V1.2@1106.39,525.61 ; V1.2@1113.46,518.54 ccw(c1073.54,558.46) 1130,558.46 cw(c1073.54,558.46) V1.2@1113.46,518.54 ; V1.2@1120.54,511.46 ccw(c1097.69,534.31) 1130,534.31 cw(c1097.69,534.31) V1.2@1120.54,511.46
NetR23_1: R23.1 V2.3 | length 403.4
  TopLayer w10: R23.1@513,771 V2.3@513,871 ; R23.1@505.93,778.07 ccw(c488.86,795.14) 513,795.14 ; R23.1@505.93,778.07 ccw(c488.86,795.14) 513,795.14 ; R23.1@505.93,778.07 ccw(c488.86,795.14) 513,795.14 ; R23.1@505.93,778.07 ccw(c488.86,795.14) 513,795.14 ; 513,795.14 ccw(c537.14,795.14) R23.1@520.07,778.07 ; 513,795.14 ccw(c537.14,795.14) R23.1@520.07,778.07 ; 513,795.14 ccw(c537.14,795.14) R23.1@520.07,778.07 ; 513,795.14 ccw(c537.14,795.14) R23.1@520.07,778.07 ; 513,822.72 ccw(c464.72,822.72) 498.86,856.86 cw(c464.72,822.72) 513,822.72 ; 513,822.72 cw(c561.28,822.72) 527.14,856.86 ccw(c561.28,822.72) 513,822.72
pads on no net: JP2.0 JP2.3 JP2.8 JP2.9 JP2.11 JP2.12 U4.1 U7.8 U7.9 U7.10 U7.12 U7.13 U7.14

## Polygon pours and split planes (outlines as drawn)
DGND on TopLayer "TopLayer-No Net" (solid, remove dead copper, pour order 1000): 0,0 2299.21,0 2299,0.21 2299,1548 1721,2126 1570,2126 754,2126 587,2126 586,2125 0,1539 0,0
DGND on BottomLayer "TopLayer-No Net" (solid, remove dead copper, pour order 1001): 0,0 2299.21,0 2299,0.21 2299,1548 1721,2126 1570,2126 754,2126 587,2126 586,2125 0,1539 0,0

## Keep-outs
TopLayer:
  circle w5: c2200,268 r55
  circle w5: c2169,1321 r55
  circle w5: c97,324 r55
  circle w5: c120,1329 r55
BottomLayer:
  circle w5: c2200,268 r55
  circle w5: c2169,1321 r55
  circle w5: c97,324 r55
  circle w5: c120,1329 r55
KeepOutLayer:
  lines w5: 783.46,2125.98 1515.75,2125.98 ; 783.59,2125.59 ccw(c1131.51,1023.19) 0,1259.84 0,0 2299.21,0 2299.21,1259.84 ccw(c1167.14,1023.55) 1515.82,2126.2

## Silkscreen, mask and mechanical layers (free items; w line width, h text height)
TopOverlay:
  circle w10: c2200.79,551.18 r98.43
  circle w10: c98.43,551.18 r98.43
  circle w10: c224.41,1515.75 r98.43
  circle w10: c2074.8,1515.75 r98.43
  text "HGD_Sensor(v0.1)-20200807" at 801,1830 h30
BottomOverlay:
  circle w10: c1149.61,971 r169.29
  circle w10: c98.43,551.18 r98.43
  circle w10: c2200.79,551.18 r98.43
  circle w10: c224.41,1515.75 r98.43
  circle w10: c2074.8,1515.75 r98.43

## Text inside footprints (layer, text, board x,y; h text height)
JP1: BottomOverlay "+" at 1698.39,207.94 h30 r90; BottomOverlay "-" at 1997.61,207.94 h30 r90
U4: BottomOverlay "R" at 1586,988 h30; BottomOverlay "W" at 1635,1218 h30; BottomOverlay "C" at 1908.33,955.71 h30; TopOverlay "R" at 1569,987 h30; TopOverlay "W" at 1843,1225 h30; TopOverlay "C" at 2083,960 h30
U5: BottomOverlay "W" at 1097,571 h30; BottomOverlay "C" at 1252,568 h30; TopOverlay "C" at 1431,565 h30; TopOverlay "W" at 844,572 h30
U6: BottomOverlay "R" at 411,953 h30; BottomOverlay "W" at 471,1222 h30; BottomOverlay "C" at 747,958 h30; TopOverlay "R" at 392,954 h30; TopOverlay "W" at 669,1219 h30; TopOverlay "C" at 731,960 h30